# Allegro board PARTICULATEMATTER.brd
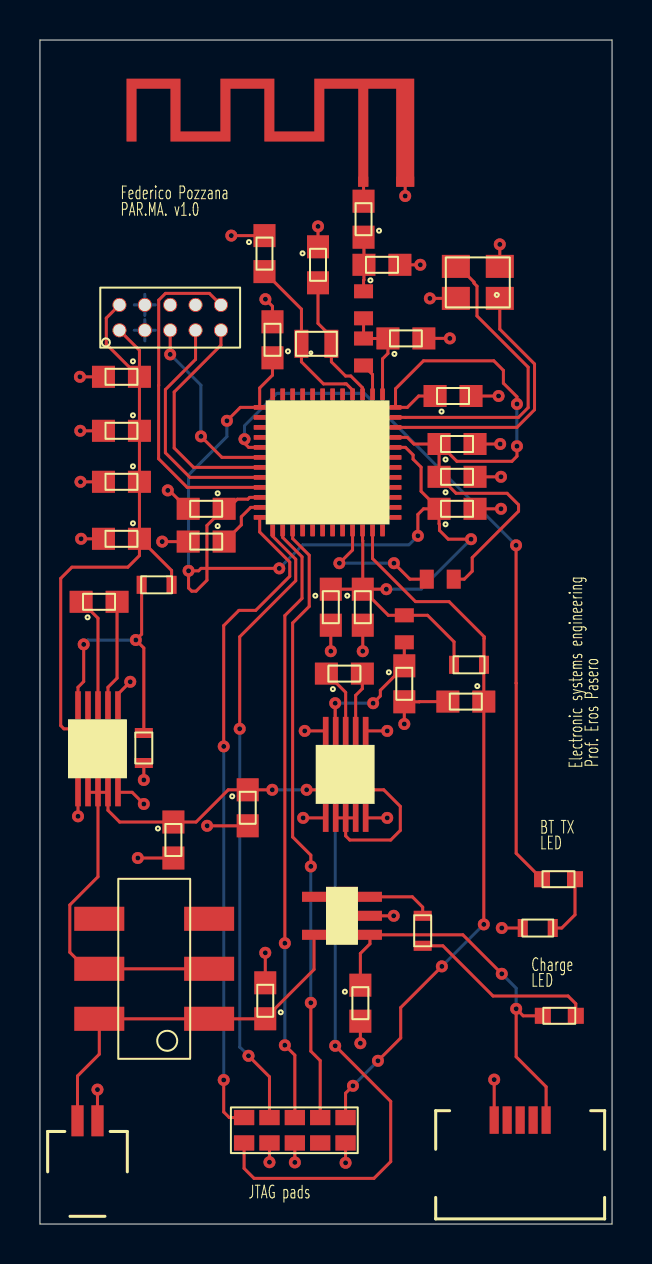
[diagram p0: board, top side]
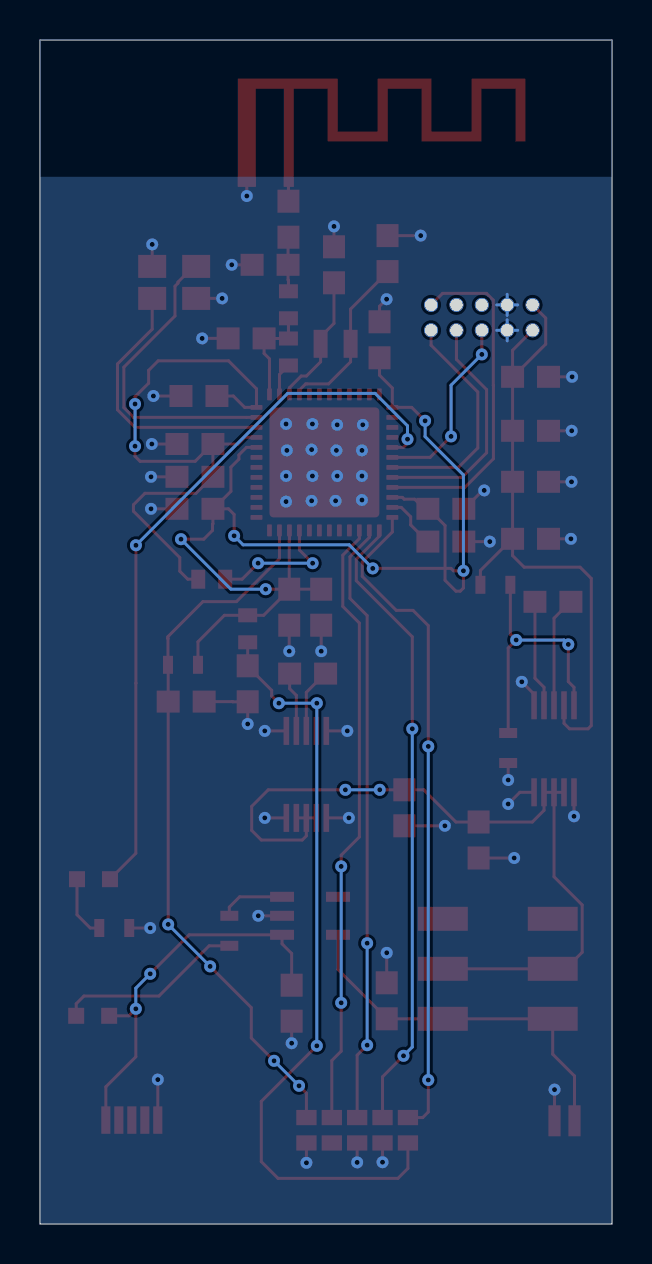
[diagram p1: board, bottom side, seen from below]

Outline 28.64 x 59.2 mm; copper layers: TOP, BOTTOM. Coordinates in mm from the lower left corner of the outline.
Outline path: 0,59.2 0,0 28.64,0 28.64,59.2 0,59.2

## Design rules (mm)
constraint set DEFAULT: min track width 0.15

## Placement (name value [footprint] x y rotation side)
A1  AN-043_PCBantenna  [AN043_FLIP]  19.23 52.37 0 top
C27  1 u - 0603  [C_0603]  16.04 11.04 270 top
C28  1 u - 0603  [C_0603]  11.28 11.16 90 top
C29  10 u - 0603  [C_0603]  10.4 20.81 270 top
C30  10 u - 0603  [C_0603]  18.24 27.01 270 top
C31  0.33 u - 0603  [C_0603]  15.24 27.52 0 top
C32  0.33 u - 0603  [C_0603]  2.96 31.11 0 top
C33  10 u - 0603  [C_0603]  6.68 19.2 270 top
C34  10 u - 0603  [C_0603]  4.08 34.26 180 top
C35  100 n - 0603  [C_0603]  4.08 37.11 180 top
C36  22 u - 0603  [C_0603]  4.08 42.36 180 top
C37  220 u - 0603  [C_0603]  4.08 39.66 180 top
C38  100 n - 0603  [C_0603]  16.16 30.84 270 top
C39  100 n - 0603  [C_0603]  20.88 35.76 0 top
C40  10 u - 0603  [C_0603]  14.56 30.84 270 top
C41  100 n - 0603  [C_0603]  11.64 44.21 90 top
C42  100 n - 0603  [C_0603]  8.32 35.76 180 top
C43  12 p - 0603  [C_0603]  13.92 47.96 270 top
C44  12 p - 0603  [C_0603]  11.24 48.52 270 top
C45  100 n - 0603  [C_0603]  21.32 26.12 180 top
C46  1 u - 0603  [C_0603]  8.32 34.12 180 top
C47  1.2 p - 0603  [C_0603]  18.32 44.28 0 top
C48  1.2 p - 0603  [C_0603]  17.12 47.96 0 top
C49  12 p - 0603  [C_0603]  16.2 50.24 90 top
C50  10 u - 0603  [C_0603]  20.88 39 0 top
C51  100 n - 0603  [C_0603]  20.88 37.36 0 top
C52  100 n - 0603  [C_0603]  20.68 41.4 0 top
D1  LED - 0603  [APG1608ZGC-SMD-LED]  26 10.41 180 top
D2  LED  [APG1608ZGC-SMD-LED]  25.96 17.24 180 top
J1  BATTERY CONNECTOR  [CONN_JST_SM02B-SRSS]  1.88 5.16 180 top
J3  SAMTEC FTSH-105-01-L-D-K  [JTAGFOOTPRINT]  12.76 4.56 0 top
L1  10 uH  [0603_L]  20.04 32.24 0 top
L2  15 nH  [0603_L]  16.2 43.6 270 top
L3  2 nH  [0603_L]  16.2 45.96 90 top
L4  MURATA BLM 18HE 152SN1  [0603_L]  18.24 29.76 90 top
MOL1  MOLEX-MICRO USB-CONNECTOR  [CON00906_5]  24.04 2.96 0 top
R1  470 - 0603  [R_0603]  19.16 14.66 90 top
R2  330 K  [R_0603]  5.84 31.96 180 top
R3  100 K  [R_0603]  5.2 23.8 270 top
R4  220 - 0603  [R_0603]  24.92 14.8 180 top
R5  100 k - 0603  [R_0603]  21.48 27.96 0 top
U3  MAXIM MAX1759  [SMD_MAX1759]  15.28 22.48 0 top
U4  MAXIM MAX1759  [SMD_MAX1759]  2.88 23.76 0 top
U5  -  [SM-UART-04L]  6.52 45.32 180 top
U6  CC2640F128RGZR  [CC2640RGZ]  14.4 38.08 270 top
U8  MAXIM MAX1555  [SMD_MAX1555]  15.12 15.41 90 top
U9  JS202011SCQN-DPDT-SWITCH  [JS202011SCQN-DPDT]  5.72 12.76 90 top
Y3  Seiko SC-20S 7pF  [SC-20S]  13.84 44.01 0 top
Y4  TSX-3225 24_1.0000MF15X-AC3  [TSX-3225]  21.92 47.08 180 top

## Library data of the parts
A1 = AN-043_PCBantenna
C27-C52 = C-0603
D1 D2 = LED
J1 = SM02B-SRSS-TB: User Part Number: PN; Tolerance: TOL
J3 = SAMTEC FTSH-105-01-L-D-K
L1-L4 = Inductor
MOL1 = MOLEX-USB-CONNECTOR: User Part Number: PN; Tolerance: TOL
R1-R5 = R2
U3 U4 = MAXIM MAX1759
U5 = SM-UART-04L
U6 = CC2640F128RGZR
U8 = MAX1555
U9 = JS202011SCQN-DPDT-SWITCH
Y3 = Seiko SC-20S 7pF
Y4 = TSX-3225 24_1.0000MF15X-AC3

## Footprints (pads in the part's own frame, mm; a bottom-side part is the same pattern mirrored in y, then rotated)
0603_L
  rect 0.7x0.95 smd: 1(-0.675,0) 2(0.675,0)
AN043_FLIP
  rect 0.5x0.5 smd: 1(-3.05,-0.25)
  rect 0.9x0.5 smd: 2(-0.95,-0.25)
APG1608ZGC-SMD-LED
  rect 0.8x0.8 smd: 1(-0.825,0) 2(0.825,0)
C_0603
  rect 1.15x1.1 smd: 1(-0.9,0) 2(0.9,0)
CC2640RGZ
  rrect 0.6x0.24 smd: 1(-3.4,2.75) 2(-3.4,2.25) 3(-3.4,1.75) 4(-3.4,1.25) 5(-3.4,0.75) 6(-3.4,0.25) 7(-3.4,-0.25) 8(-3.4,-0.75) 9(-3.4,-1.25) 10(-3.4,-1.75) 11(-3.4,-2.25) 12(-3.4,-2.75) 25(3.4,-2.75) 26(3.4,-2.25) 27(3.4,-1.75) 28(3.4,-1.25) 29(3.4,-0.75) 30(3.4,-0.25) 31(3.4,0.25) 32(3.4,0.75) 33(3.4,1.25) 34(3.4,1.75) 35(3.4,2.25) 36(3.4,2.75)
  rrect 0.24x0.6 smd: 13(-2.75,-3.4) 14(-2.25,-3.4) 15(-1.75,-3.4) 16(-1.25,-3.4) 17(-0.75,-3.4) 18(-0.25,-3.4) 19(0.25,-3.4) 20(0.75,-3.4) 21(1.25,-3.4) 22(1.75,-3.4) 23(2.25,-3.4) 24(2.75,-3.4) 37(2.75,3.4) 38(2.25,3.4) 39(1.75,3.4) 40(1.25,3.4) 41(0.75,3.4) 42(0.25,3.4) 43(-0.25,3.4) 44(-0.75,3.4) 45(-1.25,3.4) 46(-1.75,3.4) 47(-2.25,3.4) 48(-2.75,3.4)
  rrect 5.5x5.5 smd: 49(0,0)
CON00906_5
  rect 0.457x1.372 smd: 1(1.3,2.236) 2(0.65,2.236) 3(0,2.236) 4(-0.65,2.236) 5(-1.3,2.236)
CONN_JST_SM02B-SRSS
  rect 0.61x1.549 smd: 1(0,0) 2(-1,0)
JS202011SCQN-DPDT
  rect 1.2x2.5 smd: 1(-2.5,-2.75) 2(0,-2.75) 3(2.5,-2.75) 4(-2.5,2.75) 5(0,2.75) 6(2.5,2.75)
JTAGFOOTPRINT
  rect 1.016x0.762 smd: 1(-2.54,-0.508) 2(-2.54,0.762) 3(-1.27,-0.508) 4(-1.27,0.762) 5(0,-0.508) 6(0,0.762) 7(1.27,-0.508) 8(1.27,0.762) 9(2.54,-0.508) 10(2.54,0.762)
R_0603
  rect 0.5x0.9 smd: 1(-0.75,0) 2(0.75,0)
SC-20S
  rect 0.7x1.4 smd: 1(-0.75,0) 2(0.75,0)
SM-UART-04L
  round 0.7 hole 0.6: 1(2.54,0.635) 2(2.54,-0.635) 3(1.27,0.635) 4(1.27,-0.635) 5(0,0.635) 6(0,-0.635) 7(-1.27,0.635) 8(-1.27,-0.635) 9(-2.54,0.635) 10(-2.54,-0.635)
SMD_MAX1555
  rect 0.5x1.2 smd: 1(-0.95,-1.4) 2(0,-1.4) 3(0.95,-1.4) 4(0.95,1.4) 5(-0.95,1.4)
SMD_MAX1759
  rect 0.28x1.4 smd: 1(-0.975,-2.175) 2(-0.475,-2.175) 3(0.025,-2.175) 4(0.525,-2.175) 5(1.025,-2.175) 6(1.025,2.175) 7(0.525,2.175) 8(0.025,2.175) 9(-0.475,2.175) 10(-0.975,2.175)
TSX-3225
  rect 1.4x1.15 smd: 1(-1.1,0.8) 2(1.1,0.8) 3(1.1,-0.8) 4(-1.1,-0.8)

## Nets
3.3V: C30.1 J3.1 L4.1 U3.9
5V: C34.1 C35.1 C36.1 C37.1 R2.1 U4.9 U5.1 U5.2
GND_SIGNAL: A1.2(GND) C27.2 C28.2 C29.2 C30.2 C33.2 C34.2 C35.2 C36.2 C37.2 C38.2 C39.2 C40.2 C41.2 C42.2 C43.1 C44.1 C45.2 C46.2 C47.2 C48.2 C50.2 C51.2 C52.2 J1.2 J3.3 J3.5 J3.9 MOL1.5 R3.2 R4.2 U3.1 U3.5 U3.6 U3.10 U4.1 U4.5 U4.6 U5.3 U5.4 U6.49 U8.2 Y4.2 Y4.4
VDDR: C50.1 C51.1 C52.1 L1.2(B) U6.45 U6.48
VDDS: C38.1 C39.1 C40.1 C41.1 C42.1 L4.2(B) R5.1 U6.13 U6.22 U6.34 U6.44
BAT+: C28.1 J1.1 U8.5 U9.1 U9.4
BAT++: C29.1 C33.1 U3.2(SHDN) U3.3 U3.4 U4.2(SHDN) U4.3 U4.4 U9.2 U9.5
BL_RES: D2.1(CATHODE) R4.1
CHG: R1.2 U8.3
CXN: C31.2 U3.7
CXN5V: C32.2 U4.7
CXP: C31.1 U3.8
CXP5V: C32.1 U4.8
DCDC_SW: L1.1 U6.33
FB5V: R2.2 R3.1 U4.10
FEED: A1.1 C49.2
GPIO-RST: U5.5 U6.18
GPIO-SLEEP: U5.10 U6.21
GPIO-TX: D2.2 U6.17
GPIO-UART-RX: U5.7 U6.20
GPIO-UART-TX: U5.9 U6.19
GREEN LED: D1.1(CATHODE) R1.1
JTAG_TCKC: J3.4 U6.25
JTAG_TDI: J3.8 U6.27
JTAG_TDO: J3.6 U6.26
JTAG_TMSC: J3.2 U6.24
MICRO-RST: C45.1 J3.10 R5.2 U6.35
PI_FILTER: C48.1 C49.1 L3.2(B)
RF_N: L2.2(B) U6.2
RF_P: C47.1 L2.1 L3.1 U6.1
USB+: C27.1 D1.2 MOL1.1(VBUS) U8.1(USB)
X24M_N: U6.46 Y4.1
X24M_P: U6.47 Y4.3
X32K_N: C44.2 U6.4(X32K_Q2) Y3.1
X32K_P: C43.2 U6.3 Y3.2
N11734: C46.1 U6.23

Pads without a net: J3 7; MOL1 2 3 4; U5 6 8; U6 5 6 7 8 9 10 11 12 14 15 16 28 29 30 31 32 36 37 38 39 40 41 42 43; U8 4; U9 3 6

## Via types
v1: diameter 0.6, hole 0.25, TOP to BOTTOM, 92 vias

## Routing (per net, layer and track width the routed paths; a pad name or vN(x,y) marks a point on that pad's centre or on a via; arc(x,y) is an arc through that point)
3.3V: length 40.2
  TOP w0.15: v1(16.68,26.04) 17.04,26.4 17.04,26.69 18.24,27.89 C30.1 L4.1 ; v1(14.78,26.04) 14.78,24.68 14.8,24.66 ; J3.1 10.22,2.78 10.72,2.28 16.72,2.28 17.56,3.12 17.56,6.13 v1(14.78,8.91)
  BOTTOM w0.15: v1(14.78,8.91) v1(14.78,26.04) v1(16.68,26.04)
5V: length 33.4
  TOP w0.15: C34.1 5,34.26 6.59,32.68 R2.1 ; C34.1 4.98,33.42 4.4,32.84 1.6,32.84 1.04,32.28 1.04,24.92 1.2,24.76 2.13,24.76 2.41,25.03 2.41,25.94 ; C34.1 C35.1 C37.1 C36.1 ; C36.1 4.98,43.69 U5.1 ; C36.1 4.95,42.36 3.32,44 3.32,45.3 U5.2
GND_SIGNAL: length 56.6
  TOP w0.15: R4.2 v1(23.12,14.8) ; C35.2 v1(2.03,37.11) ; J1.2 v1(2.88,6.72) ; C28.2 v1(11.28,13.56) ; 3.91,25.94 3.91,26.5 v1(4.52,27.11) ; C40.2 v1(14.56,28.64) ; U5.4 v1(5.25,45.95) ; C41.2 11.64,45.89 v1(11.29,46.24) ; A1.2 v1(18.28,51.4) ; C46.2 v1(6.12,34.12) ; J3.9 v1(15.3,3.06) ; C52.2 v1(22.96,41.4) ; Y4.4 v1(23.02,48.98) ; J3.3 v1(11.49,3.09) ; v1(18.24,25) C30.2 18.99,26.11 19,26.12 C45.2 ; C27.2 v1(16.04,9.04) ; C29.2 v1(8.37,19.91) ; C39.2 v1(23.08,35.76) ; U8.2 v1(17.71,15.41) ; C51.2 v1(23.08,37.36) ; U4.5 4.61,21.59 v1(5.2,21) ; C33.2 v1(4.9,18.3) ; 14.3,24.66 v1(13.26,24.66) ; C48.2 v1(19.04,47.96) ; C42.2 7.39,35.76 6.47,36.68 v1(6.4,36.68) ; 16.3,24.66 v1(17.38,24.66) ; Y4.2 v1(19.52,46.28) ; R3.2 v1(5.2,22.2) ; U3.5 v1(17.38,20.3) ; C43.1 v1(13.92,49.88) ; 14.3,20.3 v1(13.18,20.3) ; J3.5 v1(12.76,3.08) ; C37.2 v1(2.02,39.66) ; C44.1 v1(9.58,49.42) ; C50.2 v1(23.04,39) ; C47.2 v1(20.52,44.28) ; C34.2 v1(2.06,34.26) ; MOL1.5 v1(22.74,7.22) ; C38.2 v1(16.16,28.64) ; U4.1 v1(1.91,20.39) ; C36.2 v1(2,42.36)
  BOTTOM w0.15: U5.4 5.25,46.48 ; U5.4 5.25,45.43 ; U5.4 5.78,45.95 ; U5.4 4.72,45.95 ; U5.3 5.25,45.21 ; U5.3 4.72,44.69 ; U5.3 5.78,44.69 ; U5.3 5.25,44.16
  vias: v1(12.48,39.96) v1(12.52,38.68) v1(12.52,37.4) v1(12.52,36.2) v1(13.76,39.96) v1(13.8,38.68) v1(13.76,37.4) v1(13.84,36.16) v1(15,40) v1(15.04,38.72) v1(15,37.4) v1(15.04,36.16) v1(16.32,40) v1(16.28,38.68) v1(16.32,37.4) v1(16.32,36.12)
VDDR: length 32.1
  TOP w0.15: U6.45 18.39,39.33 18.72,39 C50.1 ; L1.2 21.24,32.24 21.64,32.64 21.64,33.32 23.96,35.64 23.96,35.96 23.38,36.54 20.83,36.54 20,37.36 C51.1 C50.1 ; v1(23.88,41) 23.88,41.36 23.2,42.04 23.2,42.68 22.72,43.16 19.2,43.16 17.8,41.76 U6.48 18.39,40.83 18.96,41.4 C52.1 ; C50.1 20,39 20.87,38.14 23.63,38.14 23.88,38.39 v1(23.88,38.89)
  BOTTOM w0.15: v1(23.88,41) v1(23.88,38.89)
VDDS: length 60.4
  TOP w0.15: v1(18.92,34.41) 18.92,35.48 19.2,35.76 19.95,35.76 ; 19.95,35.76 C39.1 19.98,35.01 20,34.99 20,34.68 20.44,34.24 v1(21.58,34.24) ; 19.95,35.76 19.08,36.64 19.08,37.84 18.68,38.24 18.68,38.45 18.3,38.83 U6.44 ; C38.1 16.16,34.17 16.15,34.18 U6.34 ; C38.1 C40.1 ; C38.1 16.16,31.72 17.44,30.44 L4.2 19.41,30.44 20.73,29.11 R5.1 ; C38.1 v1(17.34,31.74) ; v1(11.98,32.78) 8.06,32.78 7.94,32.66 v1(7.44,32.66) 7.44,31.8 7.6,31.64 7.81,31.64 8.36,32.19 8.36,34.93 9.2,35.76 C42.1 9.4,35.76 9.88,36.24 10.41,36.24 10.5,36.33 U6.22 ; v1(9.36,40.16) 10.03,40.83 U6.13 11,41.8 11.64,42.44 C41.1
  BOTTOM w0.15: v1(11.98,32.78) 13.16,33.96 18.47,33.96 v1(18.92,34.41) ; v1(17.34,31.74) 19.08,31.74 v1(21.58,34.24) ; v1(9.36,40.16) 9.36,39.37 7.44,37.45 v1(7.44,32.66)
BAT+: length 19.1
  TOP w0.15: U8.5 13.72,12.73 11.28,10.29 C28.1 U9.1 U9.4 2.97,8.49 1.88,7.4 J1.1
BAT++: length 39.8
  TOP w0.15: 15.3,20.3 15.8,20.3 ; 15.3,20.3 14.8,20.3 ; 15.3,20.3 15.3,19.4 15.51,19.2 17.56,19.2 18.04,19.68 18.04,20.88 17.21,21.71 v1(13.35,21.71) ; U9.2 U9.5 2.32,12.76 1.49,13.59 1.49,15.95 2.91,17.36 U4.3 ; U4.3 U4.4 3.41,20.68 3.99,20.1 C33.1 7.82,20.1 9.43,21.71 C29.1 v1(11.63,21.71) ; U4.3 U4.2
  BOTTOM w0.15: v1(11.63,21.71) v1(13.35,21.71)
BL_RES: length 3.2
  TOP w0.15: D2.1 26.79,15.46 26.12,14.8 R4.1
CHG: length 3.3
  TOP w0.15: U8.3 18.64,16.36 19.16,15.84 R1.2
CXN: length 3
  TOP w0.15: C31.2 16.14,26.77 15.8,26.43 15.8,24.66
CXN5V: length 5.4
  TOP w0.15: C32.2 3.86,27.29 3.41,26.84 3.41,25.94
CXP: length 3.3
  TOP w0.15: C31.1 14.37,27.52 15.3,26.58 15.3,24.66
CXP5V: length 5.5
  TOP w0.15: C32.1 2.09,31.11 2.91,30.29 2.91,25.94
DCDC_SW: length 6.6
  TOP w0.15: v1(17.72,33.04) 18.52,32.24 L1.1 ; U6.33 15.65,33.7 v1(14.99,33.04)
  BOTTOM w0.15: v1(17.72,33.04) v1(14.99,33.04)
FB5V: length 13.6
  TOP w0.15: R2.2 5.09,29.49 v1(4.8,29.2) 5.2,28.8 R3.1 ; v1(2.19,28.98) 2.19,27.12 1.91,26.84 1.91,25.94
  BOTTOM w0.15: v1(2.19,28.98) 2.41,29.2 v1(4.8,29.2)
FEED: length 1
  TOP w0.15: A1.1 16.2,52.1 C49.2
GPIO-RST: length 9.3
  TOP w0.15: U5.5 v1(6.52,43.48) ; U6.18 9.11,38.33 v1(8.06,39.38)
  BOTTOM w0.15: v1(6.52,43.48) 8.06,41.94 v1(8.06,39.38)
GPIO-SLEEP: length 17.1
  TOP w0.15: U6.21 7.37,36.83 5.94,38.26 5.94,41.93 5.95,41.94 5.95,46.19 6.28,46.53 8.48,46.53 U5.10
GPIO-TX: length 36.4
  TOP w0.15: v1(23.84,33.94) 23.84,27.05 23.84,27.04 23.84,18.54 D2.2 ; v1(10.24,39.24) 10.24,39.04 10.45,38.83 U6.17
  BOTTOM w0.15: v1(10.24,39.24) 10.24,39.91 11.86,41.53 16.24,41.53 v1(23.84,33.94)
GPIO-UART-RX: length 12
  TOP w0.15: U5.7 7.79,43.23 6.28,41.72 6.28,38.56 7.51,37.33 U6.20
GPIO-UART-TX: length 11.5
  TOP w0.15: U6.19 7.69,37.83 6.72,38.8 6.72,41.6 9.06,43.94 U5.9
GREEN LED: length 9.5
  TOP w0.15: R1.1 20.17,13.91 22.68,11.4 26.44,11.4 26.82,11.01 D1.1
JTAG_TCKC: length 31.6
  TOP w0.15: v1(10,24.76) 10,29.36 12.8,32.16 12.8,33.23 11.65,34.39 U6.25 ; v1(10.44,8.41) 11.49,7.36 J3.4
  BOTTOM w0.15: v1(10,24.76) 10,8.85 v1(10.44,8.41)
JTAG_TDI: length 30.6
  TOP w0.15: U6.27 12.65,34.27 13.48,33.44 13.48,30.88 12.65,30.05 12.65,19.35 13.56,18.44 v1(13.56,17.88) ; v1(13.56,11.06) 13.56,8.64 14.03,8.17 J3.8
  BOTTOM w0.15: v1(13.56,17.88) v1(13.56,11.06)
JTAG_TDO: length 30.3
  TOP w0.15: J3.6 12.76,8.44 v1(12.26,8.94) ; U6.26 12.15,34.33 13.12,33.36 13.12,31.28 12.26,30.42 v1(12.26,14.04)
  BOTTOM w0.15: v1(12.26,14.04) v1(12.26,8.94)
JTAG_TMSC: length 33.3
  TOP w0.15: v1(9.2,23.88) 9.2,29.92 9.96,30.68 10.8,30.68 12.51,32.39 12.51,33.09 11,34.6 U6.24 ; v1(9.2,7.2) 9.2,5.6 9.48,5.32 J3.2
  BOTTOM w0.15: v1(9.2,23.88) v1(9.2,7.2)
MICRO-RST: length 35.5
  TOP w0.15: v1(22.22,14.98) C45.1 22.22,27.95 R5.2 22.23,29.27 22.24,29.28 22.24,29.36 20.48,31.12 18.8,31.12 16.65,33.27 U6.35 ; v1(16.92,8.16) 18.06,9.3 18.06,10.82 v1(20.12,12.88) ; J3.10 15.3,6.54 v1(15.67,6.91)
  BOTTOM w0.15: v1(16.92,8.16) v1(15.67,6.91) ; v1(22.22,14.98) v1(20.12,12.88)
PI_FILTER: length 2.7
  TOP w0.15: L3.2 16.2,47.19 16.22,47.21 C48.1 16.22,49.32 C49.1
RF_N: length 1.6
  TOP w0.15: U6.2 16.65,42.48 L2.2
RF_P: length 5.1
  TOP w0.15: L3.1 L2.1 17.41,44.28 C47.1 17.42,43.53 17.15,43.26 U6.1
USB+: length 19.8
  TOP w0.15: D1.2 24.19,10.41 v1(23.84,10.76) 23.84,8.36 25.34,6.86 MOL1.1 ; v1(23.12,12.51) 21.17,14.46 U8.1 16.52,14.01 16.04,13.53 C27.1
  BOTTOM w0.15: v1(23.12,12.51) 23.84,11.79 v1(23.84,10.76)
X24M_N: length 13.6
  TOP w0.15: U6.46 18.3,39.83 23.88,39.83 24.76,40.71 24.76,43 23.02,44.74 Y4.1
X24M_P: length 15.5
  TOP w0.15: Y4.3 20.94,47.88 21.73,47.09 21.73,47.04 21.88,46.89 21.88,45.4 24.44,42.84 24.44,40.82 23.95,40.33 18.3,40.33 U6.47
X32K_N: length 8.6
  TOP w0.15: U6.4 15.65,41.7 15.34,42 15.26,42.01 14.19,42.01 13.09,43.11 Y3.1 13.09,45.75 11.24,47.59 C44.2
X32K_P: length 6.7
  TOP w0.15: C43.2 13.92,45.03 14.59,44.36 Y3.2 14.59,43.11 15.3,42.4 15.56,42.4 16.15,41.81 U6.3
N11734: length 2.7
  TOP w0.15: C46.1 9.24,34.12 10.08,34.95 10.08,35.36 10.55,35.83 U6.23

## Copper pours and planes (outline as drawn; the poured copper is in the pictures)
GND_SIGNAL on TOP (solid shape): 7.03,54.63 9.03,54.63 9.03,57.27 11.73,57.27 11.73,54.63 13.73,54.63 13.73,57.27 18.73,57.27 18.73,51.87 17.83,51.87 17.83,56.77 16.43,56.77 16.43,51.87 15.93,51.87 15.93,56.77 14.23,56.77 14.23,54.13 11.23,54.13 11.23,56.77 9.53,56.77 9.53,54.13 6.53,54.13 6.53,56.77 4.83,56.77 4.83,54.13 4.33,54.13 4.33,57.27 7.03,57.27
GND_SIGNAL on BOTTOM: 0,52.36 0,0.01 28.64,0.01 28.64,52.36

## Text on the board
Ref Des/Silkscreen Top: Federico Pozzana | PAR.MA. v1.0 | JTAG pads | Charge | LED | BT TX | Electronic systems engineering | Prof. Eros Pasero
